# Altium PCB smd_challenge_extreme.PcbDoc
Units mm, origin at the board's own origin, x right, y up, seen from the top; angles counter-clockwise.
Board outline 17 x 17 mm, 2 copper layers (Top Layer, Bottom Layer), stack 0.781 mm thick; 20 components, 17 nets, 62 pads, 19 vias.
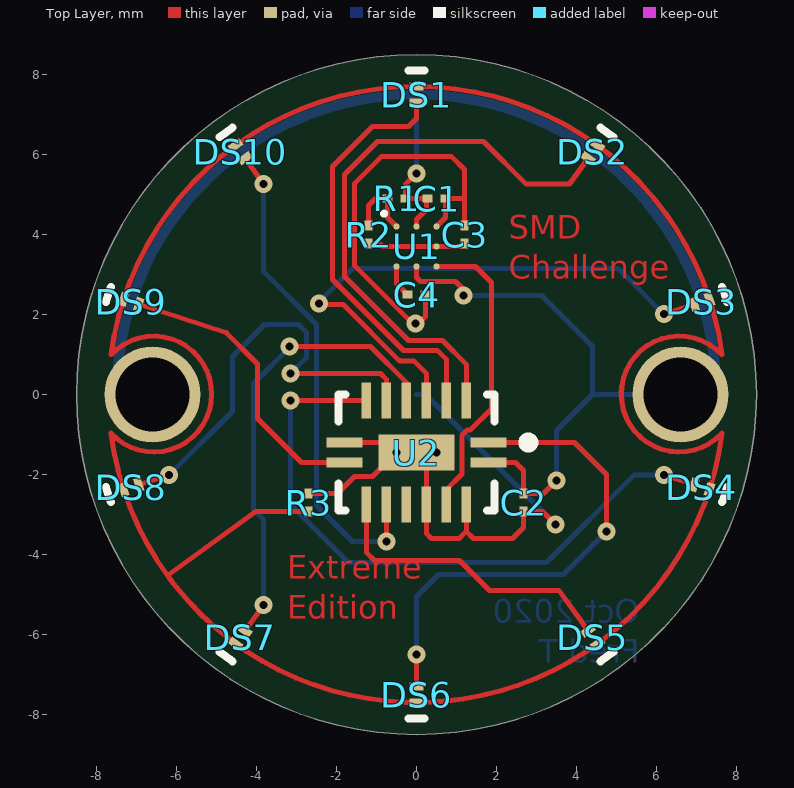
[diagram p0: Top Layer view]
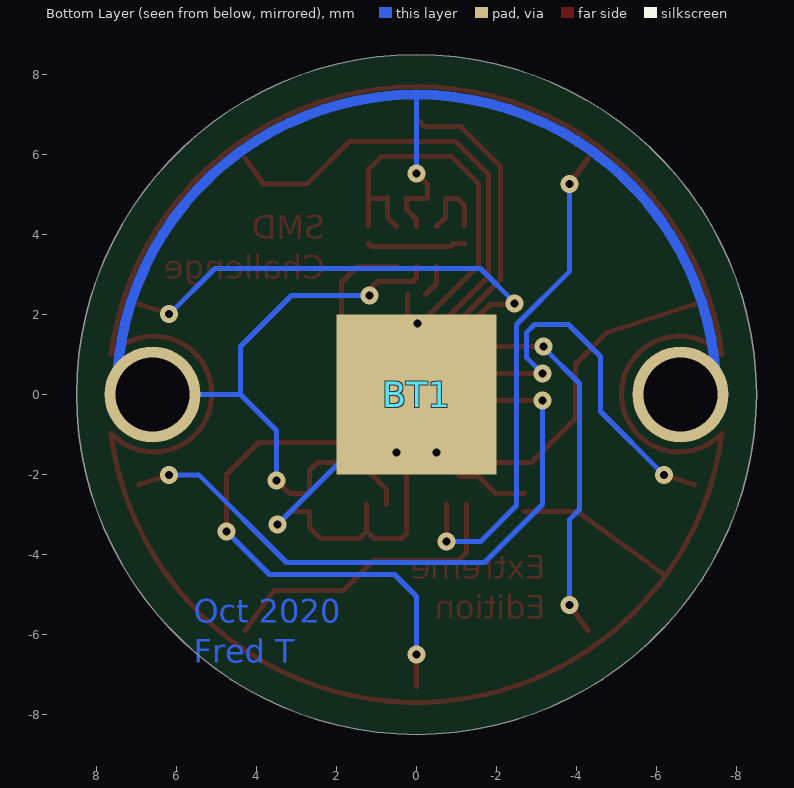
[diagram p1: Bottom Layer view, seen from below]
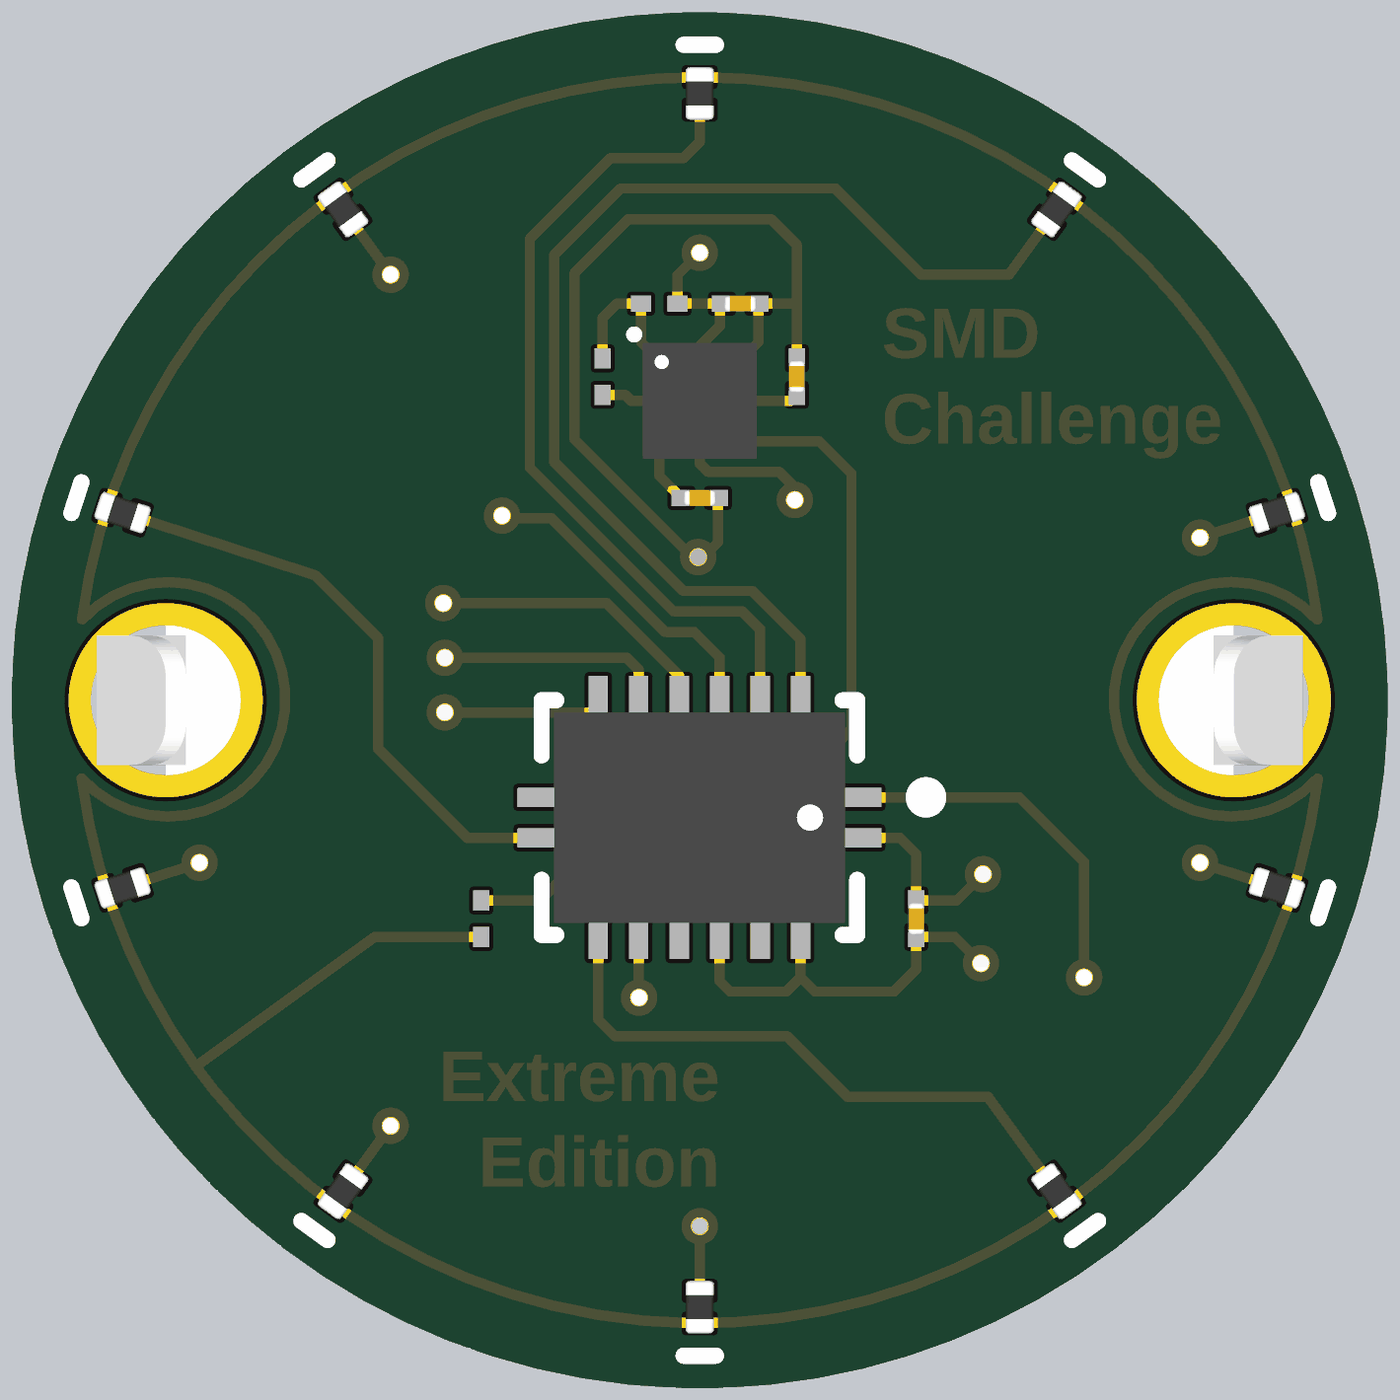
[diagram p2: 3D render of the assembled board from above, using the file's embedded part models]

## Layer stack, top to bottom
Top Solder: solder mask 0.01, Solder Resist, Dk 3.5
Top Layer: signal copper 0.035
Dielectric Layer 1: core 0.711, Core, Dk 4
Bottom Layer: signal copper 0.035
Bottom Solder: solder mask 0.01, Solder Resist, Dk 3.5

## Board outline
-8.5,0 ccw(c0,0) 0,-8.5 ccw(c0,0) 8.5,0 ccw(c0,0) 0,8.5 ccw(c0,0)

## Design rules (kind name [scope] priority, off if disabled: settings)
AcuteAngle Default-Acute-Angle [IsTrack AND (OnTop OR OnBottom)] p1: minimum=6.00000000000000E+0001 checktracksonly=TRUE
AssemblyTestPointUsage [All] p1 off:
AssemblyTestpoint [All] p1 off: testpointundercomponent=TRUE minsize=1.016 maxsize=2.54 preferedsize=1.524 minholesize=0 maxholesize=1.016 preferedholesize=0.813 testpointgrid=0.025 usegrid=TRUE gridtolerance=0 allowsidetop=TRUE allowsidebottom=TRUE
BoardOutlineClearance [NOT InNamedUnion('Layer Table Union')] p1: gap=0.25 ignorepadtopadclearanceinfootprint=FALSE
Clearance Keepout-Arc-Clearance [IsKeepOut AND IsArc vs NOT IsKeepOut] p1: gap=0.01 ignorepadtopadclearanceinfootprint=FALSE except(0: Arc-Hole Track-Hole SMDPad-Hole THPad-Hole Via-Hole Fill-Hole Poly-Hole Region-Hole Text-Hole)
Clearance Keepout-Clearance [IsKeepOut vs NOT IsKeepOut] p2: gap=0 ignorepadtopadclearanceinfootprint=FALSE
Clearance Polygon-Clearance [InPoly] p3: gap=0.3 ignorepadtopadclearanceinfootprint=FALSE except(0: Arc-Hole Track-Hole SMDPad-Hole THPad-Hole Via-Hole Fill-Hole Poly-Hole Region-Hole Text-Hole)
Clearance Default-Clearance [All] p4: gap=0.127 ignorepadtopadclearanceinfootprint=FALSE
ComponentClearance [All] p1 off: gap=0.254 collisioncheckmode=3 verticalgap=0.254 showdistances=FALSE
DiffPairsRouting [All] p1: maxlimit=0.191 minlimit=0.165 mostfreqgap=0.178 toplayer_minwidth=0.381 toplayer_maxwidth=0.381 toplayer_prefwidth=0.381 bottomlayer_minwidth=0.381 bottomlayer_maxwidth=0.381 bottomlayer_prefwidth=0.381 maxuncoupledlength=5.08
FabricationTestPointUsage TestPointUsage [All] p1 off: valid=0 allowmultiple=FALSE
FabricationTestpoint Testpoint [All] p1 off: side=3 testpointundercomponent=TRUE minsize=1.016 maxsize=2.54 preferedsize=1.524 minholesize=0 maxholesize=1.016 preferedholesize=0.813 testpointgrid=0.025 allowsidetop=TRUE allowsidebottom=TRUE usegrid=TRUE gridtolerance=0
FanoutControl Fanout_BGA [IsBGA] p1 off: bgadir=Out bgaviamode=Centered fanoutstyle=Auto fanoutdirection=Alternating viagrid=0.025 // Fanout_BGA (Default Rule)
FanoutControl Fanout_LCC [IsLCC] p2 off: bgadir=Out bgaviamode=Centered fanoutstyle=Auto fanoutdirection=Alternating viagrid=0.025 // Fanout_LCC (Default Rule)
FanoutControl Fanout_SOIC [IsSOIC] p3 off: bgadir=Out bgaviamode=Centered fanoutstyle=Auto fanoutdirection=Alternating viagrid=0.025 // Fanout_SOIC (Default Rule)
FanoutControl Fanout_Small [(CompPinCount < 5)] p4 off: bgadir=Out bgaviamode=Centered fanoutstyle=Auto fanoutdirection=OutThenIn viagrid=0.025 // Fanout_Small (Default Rule)
FanoutControl Fanout_Default [All] p5 off: bgadir=Out bgaviamode=Centered fanoutstyle=Auto fanoutdirection=Alternating viagrid=0.025 // Fanout_Default (Default Rule)
Height [All] p1 off: minheight=0 maxheight=25.4 prefheight=12.7
HoleSize Default-Hole-Size [All] p1: absolutevalues=TRUE maxlimit=5 minlimit=0.2 maxpercent=80.000 minpercent=20.000
HoleToHoleClearance [All] p1: gap=0.25 allowstackedmicrovias=TRUE
MatchedLengths [All] p1 off: tolerance=3.81 checknetsindiffpair=TRUE checkdiffpairvsdiffpair=FALSE checkxsignals=FALSE checkothers=FALSE
MinimumAnnularRing Minimum-Annular-Ring [All] p1: minimumring=0.124
MinimumSolderMaskSliver [All] p1: minsoldermaskwidth=0.1
PlaneClearance [All] p1: clearance=0.381
PlaneConnect Via-Plane-Connect [IsVia] p1: planeconnectstyle=Direct reliefexpansion=0.508 reliefentries=4 reliefconductorwidth=0.254 reliefairgap=0.254
PlaneConnect Default-Plane-Connect [All] p2: planeconnectstyle=Relief reliefexpansion=0.508 reliefentries=4 reliefconductorwidth=0.254 reliefairgap=0.254
PolygonConnect Via-Polygon-Connect [IsVia] p1: connectstyle=Direct reliefconductorwidth=0.254 reliefentries=4 polygonreliefangle="90 Angle" airgapwidth=0.254
PolygonConnect Default-Polygon-Connect [All] p2: connectstyle=Relief reliefconductorwidth=0.254 reliefentries=4 polygonreliefangle="90 Angle" airgapwidth=0.254
RoutingCorners [All] p1: cornerstyle=45-Degree minsetback=0.127 maxsetback=0.127
RoutingPriority [All] p1 off: routingpriority=0
RoutingTopology [All] p1 off: topology=Shortest
RoutingVias [All] p1: holewidth=0.3 width=0.6 viastyle="Through Hole" minholewidth=0.2 minwidth=0.45 maxholewidth=1.5 maxwidth=2
SilkToSilkClearance [All] p1: silktosilkclearance=0.25
SilkToSolderMaskClearance SilkscreenOverComponentPads [IsPad] p1: minsilkscreentomaskgap=0.1 clearancetoexposedcopper=TRUE
SolderMaskExpansion [All] p1: expansion=0.05 istentingtop=FALSE
Width [All] p1: maxlimit=10 minlimit=0.127 preferedwidth=0.2 minimp=50.000000 maximp=50.000000 favimp=50.000000
8 further rules are at their usual default settings.

## Components (designator, comment, footprint, x,y, rotation, side; value= is the part's Value field where it differs from the comment)
BT1 "?" BATT1220-KEYSTONE2895 0,0 r0 bottom locked
C1 "?" CAPC0402X02N 0.5,4.9 r0 top
C2 "?" CAPC0402X02N 2.675,-2.7 r270 top
C3 "?" CAPC0402X02N 1.2,4 r90 top
C4 "?" CAPC0402X02N 0,2.5 r0 top
DS1 "?" DIOC0604X02N 0,7.5 r270 top
DS2 "?" DIOC0604X02N 4.408,6.068 r234 top
DS3 "?" DIOC0604X02N 7.133,2.318 r198 top
DS4 "?" DIOC0604X02N 7.133,-2.318 r162 top
DS5 "?" DIOC0604X02N 4.408,-6.068 r126 top
DS6 "?" DIOC0604X02N 0,-7.5 r90 top
DS7 "?" DIOC0604X02N -4.408,-6.068 r54 top
DS8 "?" DIOC0604X02N -7.133,-2.318 r18 top
DS9 "?" DIOC0604X02N -7.133,2.318 r342 top
DS10 "?" DIOC0604X02N -4.408,6.068 r306 top
R1 "?" RESC0402X01N -0.5,4.9 r180 top
R2 "?" RESC0402X01N -1.2,4 r270 top
R3 "?" RESC0402X01N -2.7,-2.7 r90 top
U1 "?" BGA8C50P3X3_141X143X57 0,3.7 r0 top
U2 "?" QFN50P250X350X100_HS-17N -0.004,-1.45 r270 top

## Footprints (in the part's own frame and the unit in brackets; to place one, negate y for a bottom-side part, rotate by r counter-clockwise, add the part's x,y. Pads: shape width x height; smd on the part's side, far side on the other; paste and mask are expansions set on the pad)
BATT1220-KEYSTONE2895 [mm]
  round 2.4 hole 1.85: 1(-6.6,0) 1(6.6,0)
  rect 4x4 smd: 2(0,0)
  body extent -7.45,-6.7 7.45,6, height 3
BGA8C50P3X3_141X143X57 [mm] "BGA, 8-Leads, Body 1.41x1.43mmx0.57mm, Pitch 0.50mm"
  round 0.16 smd paste+0.07 mask+0.05: A1(-0.5,0.5) A2(0,0.5) A3(0.5,0.5) B1(-0.5,0) B3(0.5,0) C1(-0.5,-0.5) C2(0,-0.5) C3(0.5,-0.5)
  silkscreen extent -0.86,0.77 -0.76,0.87, body extent -0.7,-0.71 0.7,0.71, height 0.58
CAPC0402X02N [mm] "Chip Capacitor, 2-Leads, Body 0.40x0.20mm, IPC Medium Density"
  rect 0.25x0.2 smd: 1(-0.225,0) 2(0.225,0)
  body extent -0.2,-0.1 0.2,0.1, height 0.2
DIOC0604X02N [mm] "Chip Diode, 2-Leads, Body 0.65x0.35mm, IPC Medium Density"
  rect 0.2x0.35 smd: 1(-0.2,0) 2(0.2,0)
  silkscreen extent -0.6,-0.2 -0.6,0.2, body extent -0.33,-0.18 0.33,0.18, height 0.2
QFN50P250X350X100_HS-17N [mm] "QFN, 16-Leads, Body 2.50x3.50mm, Pitch 0.50mm, Thermal Pad 0.90x1.90mm, IPC Medium Density"
  rect 0.24x0.9 smd: 1(-0.25,1.8) 8(-0.25,-1.8) 9(0.25,-1.8) 16(0.25,1.8)
  rect 0.9x0.24 smd: 2(-1.3,1.25) 3(-1.3,0.75) 4(-1.3,0.25) 5(-1.3,-0.25) 6(-1.3,-0.75) 7(-1.3,-1.25) 10(1.3,-1.25) 11(1.3,-0.75) 12(1.3,-0.25) 13(1.3,0.25) 14(1.3,0.75) 15(1.3,1.25)
  rect 0.9x1.9 smd: 17(0,0)
  silkscreen extent -1.45,-1.95 1.45,2.93, body extent -1.3,-1.8 1.3,1.8, height 1
RESC0402X01N [mm] "Chip Resistor, 2-Leads, Body 0.40x0.20mm, IPC Medium Density"
  rect 0.25x0.2 smd: 1(-0.225,0) 2(0.225,0)
  body extent -0.2,-0.1 0.2,0.1, height 0.13

## Part data
BT1: library part "BAT CELL HOLDER 1220", "CR1220 COIN CELL THM RETAINER", Manufacturer 1="Keystone Electronics", Manufacturer Part Number 1=2895, Supplier Part Number 1=36-2895-ND, _Verified BOM=.mfr-pn?, _Verified Footprint=".mfr-pn? footprint?", _Verified Symbol=.mfr-pn?, Pricing 1="1=0.62000, 25=0.52320, 100=0.44520, 250=0.41780, 500=0.37370, 2500=0.37210 (USD)", Size=1220, Supplier 1=Digi-Key
C1 C2 C3: library part "CAP 100nF 01005", "CAP CER 0.1UF 6.3V X5R 01005", Capacitance 1=100nF, Case/Package=Ceramic, Manufacturer 1="Kyocera AVX", Manufacturer Part Number 1=CM02X5R104M06AH, Max Operating Temperature=85°C, Min Operating Temperature=-55°C, Supplier Part Number 1=1253-CM02X5R104M06AHCT-ND, Tolerance 1=20%, Voltage 1=6.3V, _Verified BOM=.mfr-pn?, _Verified Footprint=".mfr-pn? footprint?", _Verified Symbol=.mfr-pn?, ComponentLink1Description=http://global.kyocera.com/prdct/electro/pdf/capacitors/cm_e.pdf?src-supplier=Avnet+Asia, ComponentLink1URL=http://global.kyocera.com/prdct/electro/pdf/capacitors/cm_e.pdf?src-supplier=Avnet+Asia, Contact Plating=Tin, Description-Param 1="Cap Ceramic 0.1uF 6.3V X5R 20% SMD 01005 85C T/R", Length=0.4mm, Mount="Surface Mount", Pricing 1="1=0.10000, 10=0.05100, 50=0.02780, 100=0.02260, 500=0.01618, 1000=0.01271, 2500=0.01155, 5000=0.01063 (USD)", Supplier 1=Digi-Key
C4: library part "CAP 10nF 01005", "CAP CER 10000PF 6.3V X7S 01005", Capacitance 1=10nF, Manufacturer 1="Taiyo Yuden", Manufacturer Part Number 1=JMK042C7103KC-W, Supplier Part Number 1=587-6219-1-ND, _Verified BOM=.mfr-pn?, _Verified Footprint=".mfr-pn? footprint?", _Verified Symbol=.mfr-pn?, ComponentLink1Description=https://www.yuden.co.jp/productdata/catalog/mlcc02_e.pdf?src-supplier=Digi-Key, ComponentLink1URL=https://www.yuden.co.jp/productdata/catalog/mlcc02_e.pdf?src-supplier=Digi-Key, Description-Param 1="Cap Cer 10000PF 6.3V X7S 01005", Pricing 1="1=0.10000, 10=0.01200, 50=0.00660, 100=0.00540, 500=0.00386, 1000=0.00303, 2500=0.00275, 5000=0.00253 (USD)", Supplier 1=Digi-Key, Votlage 1=6.3V
DS1 DS2 DS3 DS4 DS5 DS6 DS7 DS8 DS9 DS10: library part "LED RED 0201", "LED RED CLEAR 2SMD", Case/Package=SMD/SMT, Colour=Red, Forward Voltage=1.93V, Lens Color=Colorless, Manufacturer 1=Kingbright, Manufacturer Part Number 1=APG0603SEC-E-TT, Supplier Part Number 1=754-2028-1-ND, Test Current=10mA, _Verified BOM=.mfr-pn?, _Verified Footprint=".mfr-pn? footprint?", _Verified Symbol=.mfr-pn?, ComponentLink1Description=http://www.kingbrightusa.com/images/catalog/SPEC/APG0603SEC-E-TT.pdf?src-supplier=Digi-Key, ComponentLink1URL=http://www.kingbrightusa.com/images/catalog/SPEC/APG0603SEC-E-TT.pdf?src-supplier=Digi-Key, Description-Param 1="LED RED CLEAR 2SMD", Dominant Wavelength=624nm, Height 1=0.25mm, Lead Free="Lead Free", Length=0.65mm, Lens Transparency=Clear, Mount="Surface Mount", Pricing 1="1=0.43000, 10=0.30600, 100=0.19970, 500=0.14490, 1000=0.11340 (USD)", Supplier 1=Digi-Key, Width=0.35mm
R1: library part "RES 100K 01005", "RES SMD 100K OHM 1% 1/32W 01005", Manufacturer 1=Cyntec, Manufacturer Part Number 1=PFR02S-104-FNH, Resistance 1=100K, Supplier Part Number 1=2037-PFR02S-104-FNHCT-ND, _Verified BOM=.mfr-pn?, _Verified Footprint=".mfr-pn? footprint?", _Verified Symbol=.mfr-pn?, Pricing 1="1=0.10000, 10=0.02600, 100=0.01060, 1000=0.00477, 2500=0.00414, 5000=0.00342 (USD)", Supplier 1=Digi-Key
R2: library part "RES 680K 01005", "RES SMD 680K OHM 5% 1/32W 01005", Case Code (Imperial)=1005, Case Code (Metric)=0402, Case/Package=Molded, Manufacturer 1=Panasonic, Manufacturer Part Number 1=ERJ-XGNJ684Y, Max Operating Temperature=125°C, Max Power Dissipation=30mW, Min Operating Temperature=-55°C, Power Rating=31mW, Resistance 1=680K, Resistor Type="Thick Film", Supplier Part Number 1=P680KAWCT-ND, Temperature Coefficient 1=200ppm/°C, Tolerance 1=5%, Voltage Rating 1=15V, _Verified BOM=.mfr-pn?, _Verified Footprint=".mfr-pn? footprint?", _Verified Symbol=.mfr-pn?, ComponentLink1Description=https://datasheet.ciiva.com/6553/erjxgn-6553846.pdf?src-supplier=Digi-Key, ComponentLink1URL=https://datasheet.ciiva.com/6553/erjxgn-6553846.pdf?src-supplier=Digi-Key, ComponentLink2Description=https://datasheet.ciiva.com/6553/erjxgn-6553848.pdf?src-supplier=Digi-Key, ComponentLink2URL=https://datasheet.ciiva.com/6553/erjxgn-6553848.pdf?src-supplier=Digi-Key, Description-Param 1="RES SMD 680K OHM 5% 1/32W 01005", Height 1=0.006inch, Length=0.016inch, Mount="Surface Mount", Pricing 1="1=0.16000, 10=0.13200, 100=0.05160, 1000=0.02160, 2500=0.01980, 5000=0.01800 (USD)", Supplier 1=Digi-Key, Width=0.008inch
R3: library part "RES 1K 01005", "RES SMD 1K OHM 1% 1/32W 01005", Manufacturer 1=Cyntec, Manufacturer Part Number 1=PFR02S-102-FNH, Resistance 1=1K, Supplier Part Number 1=2037-PFR02S-102-FNHCT-ND, _Verified BOM=.mfr-pn?, _Verified Footprint=".mfr-pn? footprint?", _Verified Symbol=.mfr-pn?, Pricing 1="1=0.10000, 10=0.02600, 100=0.01060, 1000=0.00477, 2500=0.00414, 5000=0.00342 (USD)", Supplier 1=Digi-Key
U1: library part "IC LMC555CTPX", "IC OSC SINGLE TIMER 3MHZ 8-USMD", Frequency 1=3MHz, High Level Output Current=-10mA, Low Level Output Current=50mA, Manufacturer 1="TI National Semiconductor", Manufacturer Part Number 1=LMC555CTPX/NOPB, Max Operating Temperature=125°C, Max Power Dissipation=568mW, Max Supply Voltage=15V, Min Operating Temperature=-40°C, Min Supply Voltage=1.5V, Nominal Supply Current=50uA, Operating Supply Current=150uA, Output Current=100mA, Supplier Part Number 1=296-46430-1-ND, _Verified BOM=.mfr-pn?, _Verified Footprint=".mfr-pn? footprint?", _Verified Symbol=.mfr-pn?, ComponentLink1Description=https://datasheet.ciiva.com/6666/lmc555-6666976.pdf?src-supplier=Digi-Key, ComponentLink1URL=https://datasheet.ciiva.com/6666/lmc555-6666976.pdf?src-supplier=Digi-Key, ComponentLink2Description=https://datasheet.ciiva.com/15152/getdatasheetpartid-628891-15152597.pdf?src-supplier=Verical, ComponentLink2URL=https://datasheet.ciiva.com/15152/getdatasheetpartid-628891-15152597.pdf?src-supplier=Verical, ComponentLink3Description=https://datasheet.ciiva.com/14274/lmc555-14274422.pdf?src-supplier=Avnet, ComponentLink3URL=https://datasheet.ciiva.com/14274/lmc555-14274422.pdf?src-supplier=Avnet, ComponentLink4Description=https://datasheet.ciiva.com/14274/lmc555-14274486.pdf?src-supplier=Avnet, ComponentLink4URL=https://datasheet.ciiva.com/14274/lmc555-14274486.pdf?src-supplier=Avnet, Description-Param 1="IC OSC SINGLE TIMER 3MHZ 8-USMD", Lead Free="Lead Free", Mount="Surface Mount", Number of Pins=8, Number of Timers/Counters=1, Power Dissipation=568mW, Pricing 1="1=1.27000, 10=1.13300, 25=1.07520, 100=0.88320, 250=0.82560, 500=0.72960, 1000=0.57600 (USD)", Propagation Delay=100ns, Quiescent Current=50uA, Radiation Hardening=No, Supplier 1=Digi-Key, Turn-On Delay Time=100ns
U2: library part "IC 74HC4017BQ", "IC JOHNSON DECADE CNTR 16-DHVQFN", Manufacturer 1=Nexperia, Manufacturer Part Number 1=74HC4017BQ,115, Supplier Part Number 1=1727-7943-1-ND, _Verified BOM=.mfr-pn?, _Verified Footprint=".mfr-pn? footprint?", _Verified Symbol=.mfr-pn?, ComponentLink1Description=http://datasheet.octopart.com/74HC4017BQ%2C115-Nexperia-datasheet-86672705.pdf?src-supplier=Nexperia, ComponentLink1URL=http://datasheet.octopart.com/74HC4017BQ%2C115-Nexperia-datasheet-86672705.pdf?src-supplier=Nexperia, ComponentLink2Description=http://datasheet.octopart.com/74HC4017BQ%2C115-Philips-datasheet-547741.pdf?src-supplier=NXP+Semiconductors, ComponentLink2URL=http://datasheet.octopart.com/74HC4017BQ%2C115-Philips-datasheet-547741.pdf?src-supplier=NXP+Semiconductors, Description-Param 1="74HC4017; 74HCT4017 - Johnson decade counter with 10 decoded outputs", Pricing 1="1=0.53000, 10=0.45000, 25=0.42000, 100=0.33600, 250=0.31200, 500=0.26400, 1000=0.20400 (USD)", Supplier 1=Digi-Key

## Via types
v1: diameter 0.45, hole 0.2, Top Layer to Bottom Layer, tented both sides, 19 vias

## Nets (pads, with @x,y where several pads share a name; then routed paths per layer and width w, separated by ;. In a path a pad name is that pad's centre, name@x,y a point inside that pad or via, vN(x,y) a via of type N, cw(c..) or ccw(c..) an arc to the next point about the centre after c; other vN are vias at no path point)
CLOCK: U1.C3 U2.14 | length 7.6
  Top Layer w0.127: U1.C3 1.475,3.2 1.875,2.8 1.875,-0.36 1.346,-0.889 1.311,-0.889 1.267,-0.889 1.136,-1.02 1.136,-1.064 1.136,-1.989 0.746,-2.379 U2.14
CTRL: C4.1 U1.C1 | length 0.8
  Top Layer w0.127: U1.C1 -0.5,2.775 C4.1
DIS: R1.2 R2.1 U1.A1 | length 1.8
  Top Layer w0.127: R2.1 -1.2,4.725 -1.025,4.9 R1.2 -0.725,4.425 U1.A1
GND: BT1.2 C1.2 C2.2 C3.2 C4.2 R3.2 U1.A3 U2.8 U2.13 U2.15 U2.17 | length 26.6
  Top Layer w0.127: R3.2 -1.975,-2.475 -1.55,-2.05 -1.1,-2.05 v1(-0.5,-1.45) -0.75,-1.2 U2.8 ; C4.2 0.225,1.95 0.045,1.77 v1(-0.02,1.77) -0.095,1.77 -1.546,3.221 -1.546,5.279 -0.879,5.946 0.879,5.946 1.2,5.625 1.2,4.925 ; v1(0.5,-1.45) 0.246,-1.704 U2.13 0.246,-3.471 0.375,-3.6 1.067,-3.6 1.246,-3.421 ; U1.A3 0.725,4.425 C1.2 ; C1.2@0.725,4.925 C1.2 ; C3.2 1.2,4.925 ; U2.15 1.246,-3.421 ; v1(3.475,-3.25) 3.15,-2.925 C2.2 2.675,-3.325 2.4,-3.6 1.425,-3.6 1.246,-3.421 ; C1.2 1.175,4.9 1.2,4.925
  Bottom Layer w0.127: BT1.2 0.225,0 v1(3.475,-3.25)
NetDS1_1: DS1.1 DS2.1 DS3.1 DS4.1 DS5.1 DS6.1 DS7.1 DS8.1 DS9.1 DS10.1 R3.1 | length 62.4
  Top Layer w0.127: -7.64,-0.966 ccw(c-6.57,0.011) -7.638,-0.968 ; -7.638,-0.965 ccw(c0.001,0.001) -7.638,-0.968 ; -7.634,1.003 cw(c0,0) 7.635,1.001 ; -7.627,1.002 cw(c-6.57,0.011) -7.638,-0.968 ; -6.229,-4.526 -6.228,-4.525 ; R3.1 -4.017,-2.925 -6.228,-4.525 ; 7.627,1 ccw(c6.567,0.013) 7.633,-0.968 ; 7.639,-0.974 cw(c0.001,0.001) -6.011,-4.809 cw(c0.001,0.001) -6.228,-4.525 ; -7.638,-0.968 ccw(c0.001,0.001) -6.228,-4.525
OUT0: DS1.2 U2.3 | length 10.5
  Top Layer w0.127: DS1.2 0,6.9 -0.2,6.7 -1.1,6.7 -2.1,5.7 -2.1,4.8 -2.1,2.875 -0.325,1.1 -0.309,1.1 -0.305,1.096 0.529,1.096 0.746,0.879 U2.3
OUT1: DS2.2 U2.2 | length 14.6
  Top Layer w0.127: U2.2 1.246,0.754 0.65,1.35 -0.2,1.35 -1.8,2.95 -1.8,5.5 -0.975,6.325 1.675,6.325 2.741,5.259 3.821,5.259 DS2.2
OUT2: DS3.2 U2.4 | length 14.4
  Top Layer w0.127: v1(-2.444,2.281) -2.412,2.25 -1.834,2.25 -0.43,0.846 -0.414,0.846 -0.41,0.842 -0.067,0.842 0.246,0.529 U2.4 ; v1(6.182,2.009) DS3.2
  Bottom Layer w0.127: v1(-2.444,2.281) -2.444,2.306 -1.6,3.15 5.04,3.15 v1(6.182,2.009)
OUT3: DS4.2 U2.7 | length 16.1
  Top Layer w0.127: v1(-3.15,-0.15) U2.7 ; v1(6.182,-2.009) DS4.2
  Bottom Layer w0.127: v1(-3.15,-0.15) -3.15,-2.75 -1.7,-4.2 3.25,-4.2 5.441,-2.009 v1(6.182,-2.009)
OUT4: DS5.2 U2.10 | length 7.6
  Top Layer w0.127: U2.10 -1.254,-3.946 -1.05,-4.15 1.075,-4.15 1.825,-4.9 3.56,-4.9 DS5.2
OUT5: DS6.2 U2.1 | length 12.4
  Top Layer w0.127: DS6.2 v1(0,-6.5) ; U2.1 3.95,-1.2 4.75,-2 v1(4.75,-3.425)
  Bottom Layer w0.127: v1(0,-6.5) 0,-5.05 0.55,-4.5 3.675,-4.5 v1(4.75,-3.425)
OUT6: DS7.2 U2.5 | length 11.5
  Top Layer w0.127: DS7.2 v1(-3.821,-5.259) ; v1(-3.17,1.2) -1.15,1.2 -0.254,0.304 U2.5
  Bottom Layer w0.127: v1(-3.821,-5.259) -3.821,-3.129 -4.075,-2.875 -4.075,0.275 -3.17,1.18 v1(-3.17,1.2)
OUT7: DS8.2 U2.6 | length 10.9
  Top Layer w0.127: DS8.2 v1(-6.182,-2.009) ; v1(-3.15,0.525) -0.9,0.525 -0.754,0.379 U2.6
  Bottom Layer w0.127: v1(-6.182,-2.009) -4.6,-0.427 -4.6,0.95 -3.8,1.75 -2.95,1.75 -2.754,1.554 -2.754,0.921 v1(-3.15,0.525)
OUT8: DS9.2 U2.9 | length 7.4
  Top Layer w0.127: DS9.2 -4.755,1.545 -3.975,0.765 -3.975,-0.6 -2.875,-1.7 U2.9
OUT9: DS10.2 U2.11 | length 12.4
  Top Layer w0.127: DS10.2 v1(-3.821,5.259) ; U2.11 -0.754,-3.621 -0.75,-3.625 v1(-0.75,-3.675)
  Bottom Layer w0.127: v1(-3.821,5.259) -3.821,3.071 -2.5,1.75 -2.5,-2.775 -1.666,-3.61 -1.6,-3.675 v1(-0.75,-3.675)
THR: C3.1 R2.2 U1.B1 U1.B3 | length 2.5
  Top Layer w0.127: R2.2 -0.925,3.775 -0.85,3.7 U1.B1 U1.B3 1.125,3.7 C3.1
VBATT: BT1.1 C1.1 C2.1 R1.1 U1.A2 U1.C2 U2.16 | length 41.5
  Top Layer w0.127: U1.C2 0,2.925 0.1,2.825 0.975,2.825 1.175,2.625 v1(1.175,2.475) ; U1.A2 0,4.375 0.25,4.625 C1.1@0.25,4.9 ; v1(0,5.53) -0.275,5.256 R1.1 C1.1@0.25,4.9 ; C1.1 C1.1@0.25,4.9 ; U2.16 2.475,-1.7 2.675,-1.9 C2.1 3.175,-2.475 v1(3.5,-2.15)
  Bottom Layer w0.127: v1(0,5.53) 0,7.5 ; v1(1.175,2.475) 3.125,2.475 4.4,1.2 4.4,0 ; v1(3.5,-2.15) 3.5,-0.9 4.4,0 ; BT1.1@6.6,0 4.4,0
  Bottom Layer w0.254: BT1.1@-7.5,0 cw(c0,0) 0,7.5 cw(c0,0) BT1.1@7.5,0
pads on no net: U2.12

## Other copper
Top Layer:
  text "SMD  / Challenge" at 2.3,2.7 h1
  text "Extreme / Edition" at -3.226,-5.8 h1
Bottom Layer:
  text "Oct 2020 / Fred T" at 5.575,-6.9 h1

## Silkscreen, mask and mechanical layers (free items; w line width, h text height)
Route Tool Path:
  circle w0.1: c0,0 r8.5